# Altium PCB PT-MIS-PCB-006_v1 PCB.PcbDoc
Units mil, origin at the board's own origin, x right, y up, seen from the top; angles counter-clockwise.
Board outline 3267.72 x 3937.01 mil, 2 copper layers (Top Layer, Bottom Layer), stack 62.192 mil thick; 14 components, 15 nets, 77 pads, 61 vias.
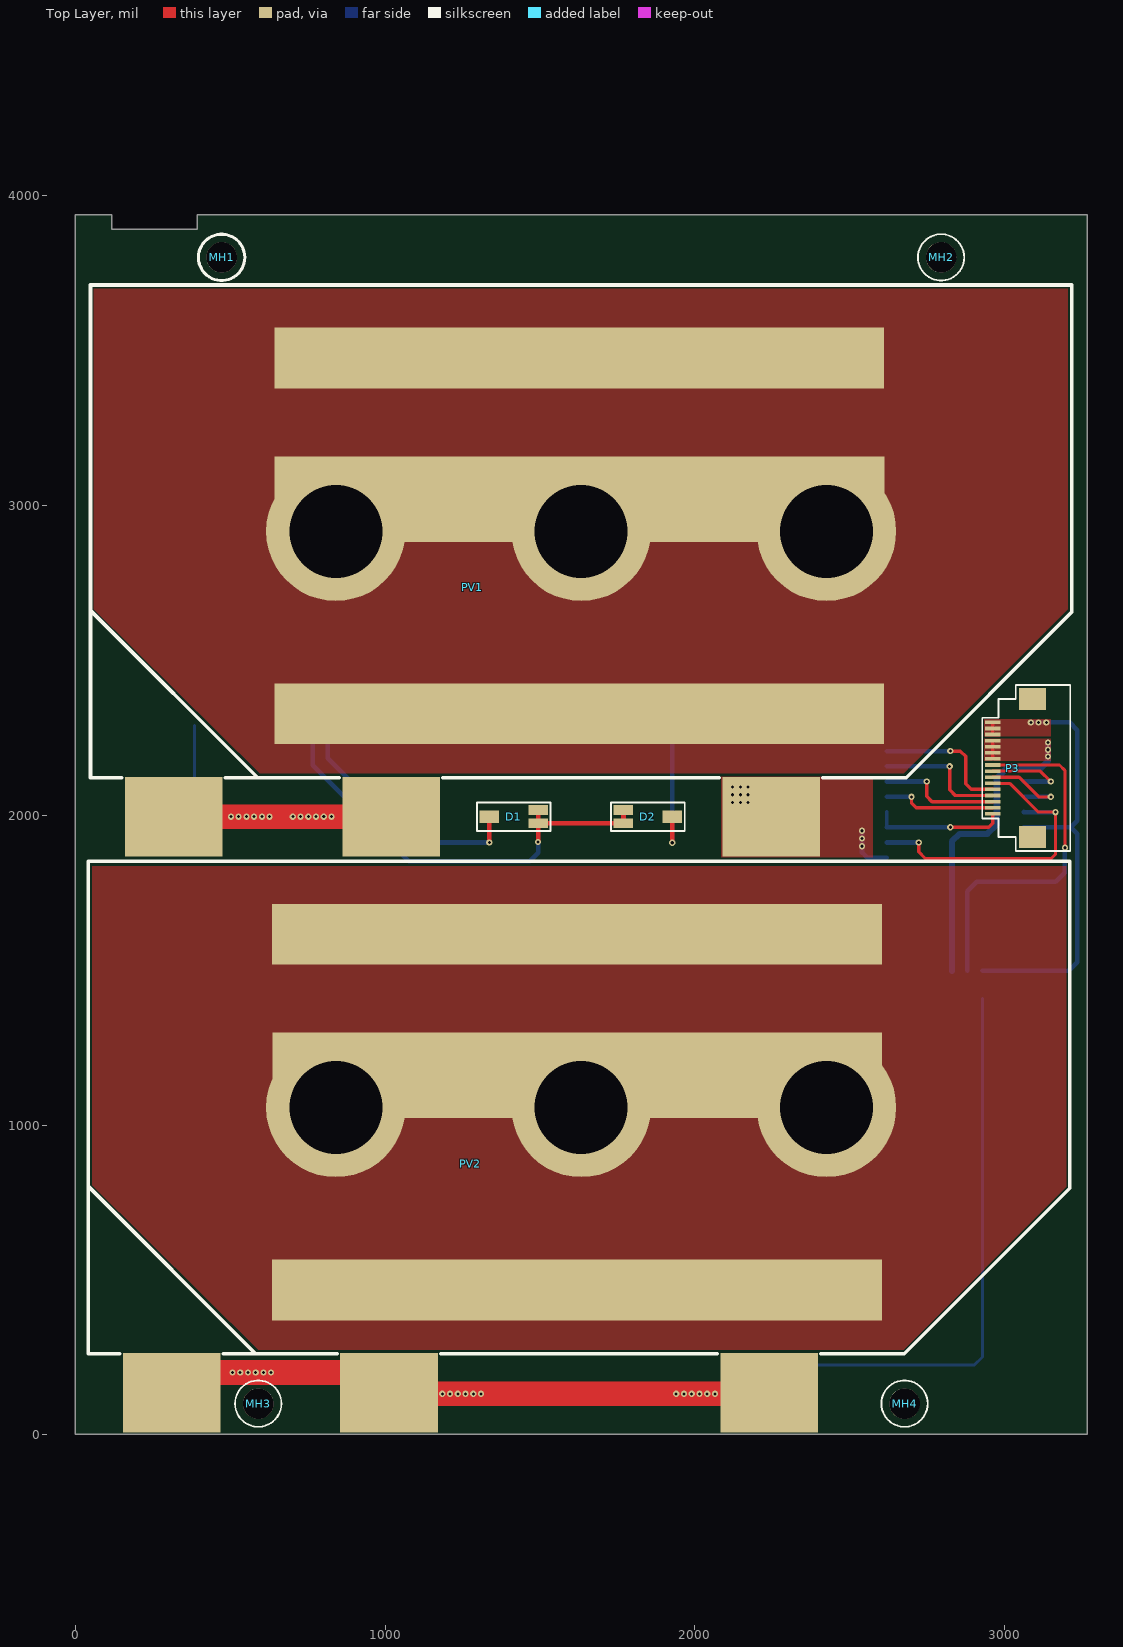
[diagram p0: Top Layer view]
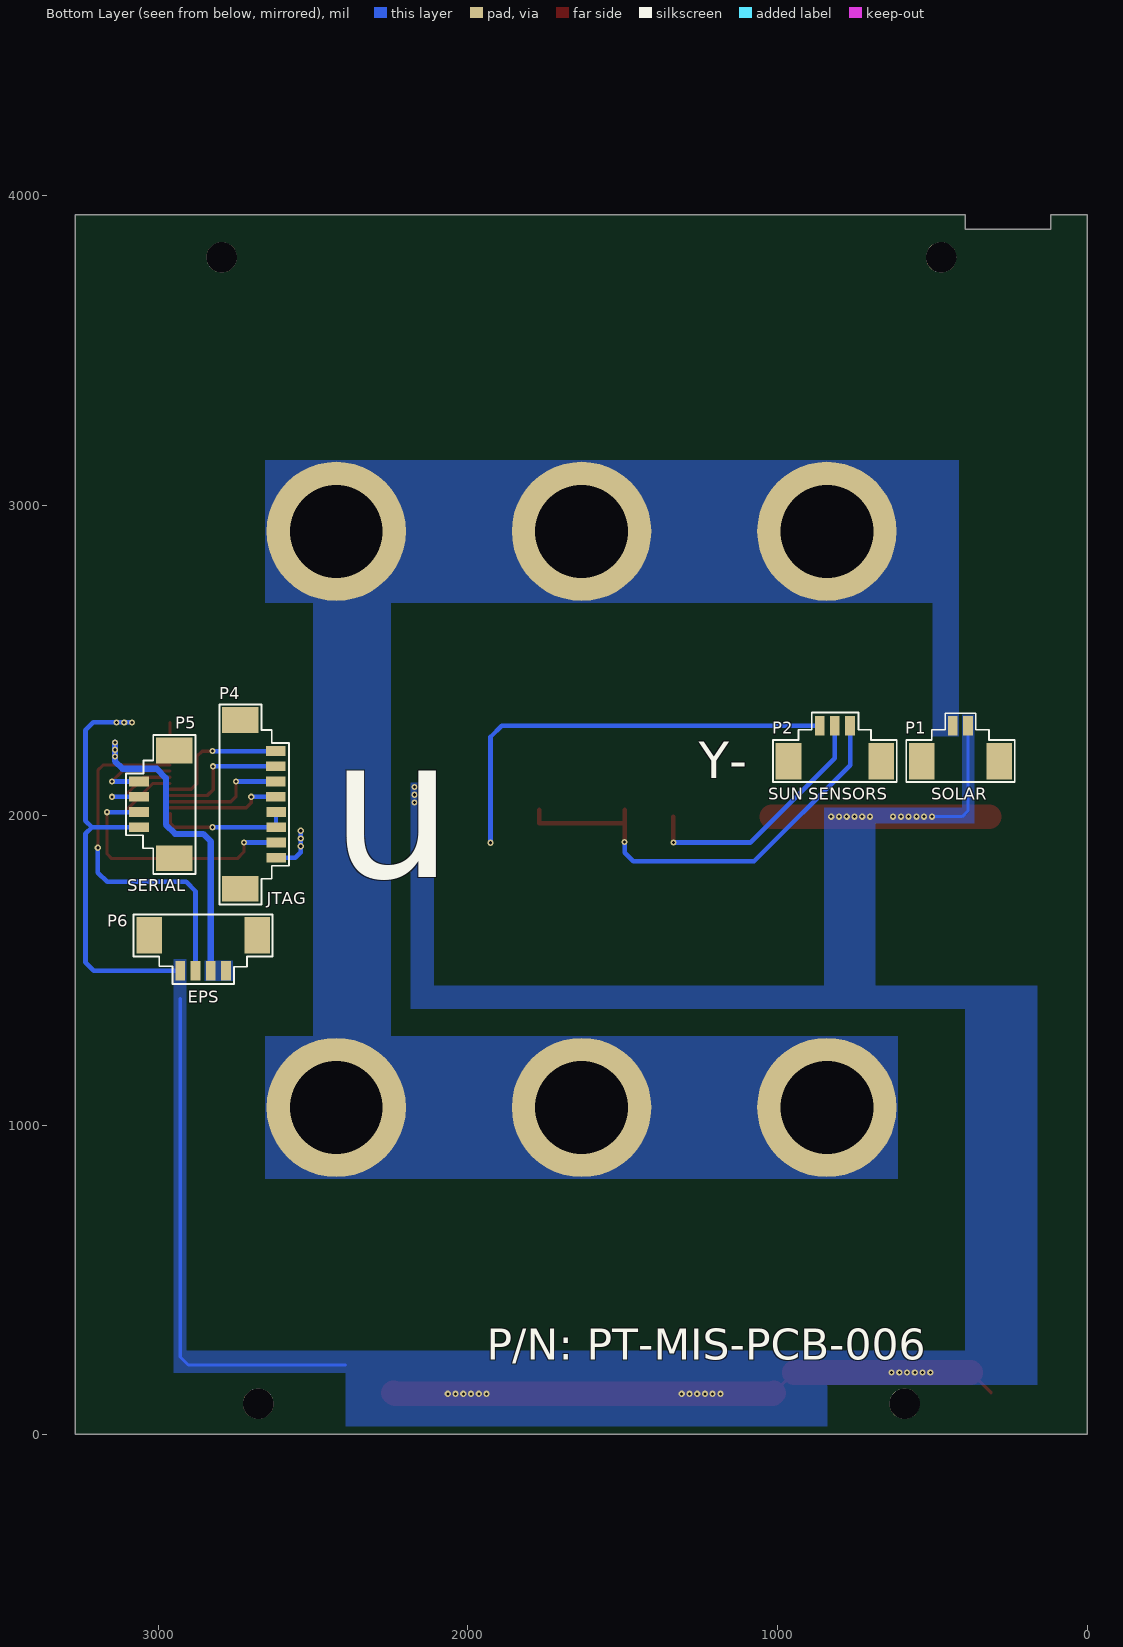
[diagram p1: Bottom Layer view, seen from below]
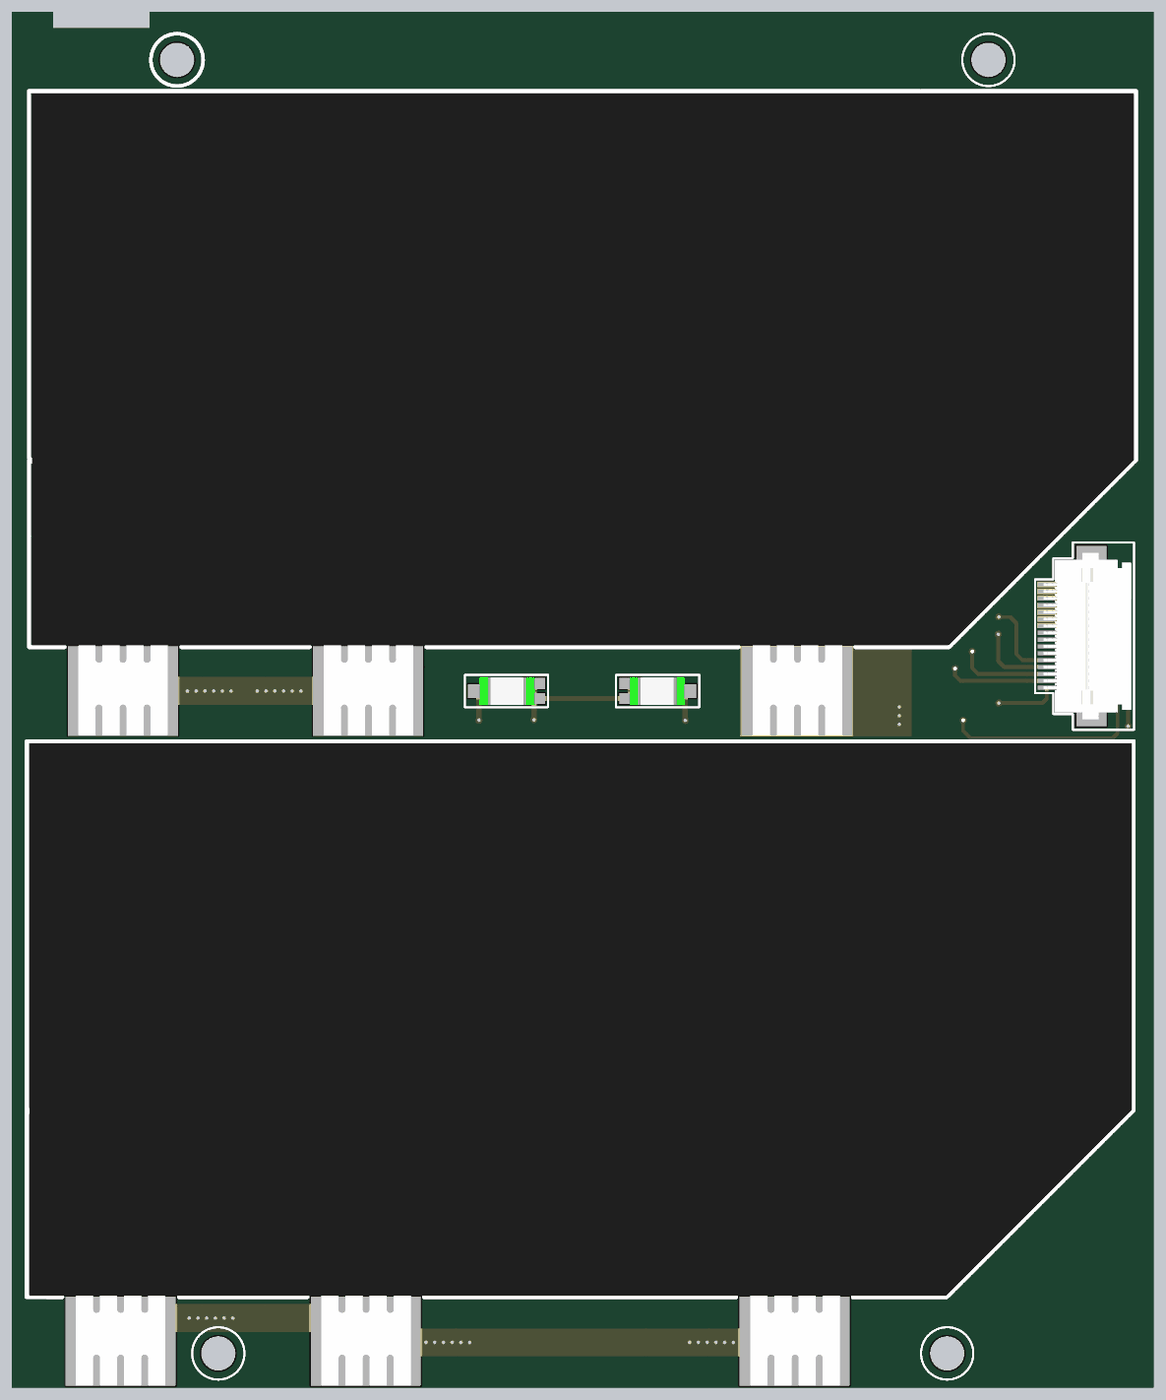
[diagram p2: 3D render of the assembled board from above, using the file's embedded part models]
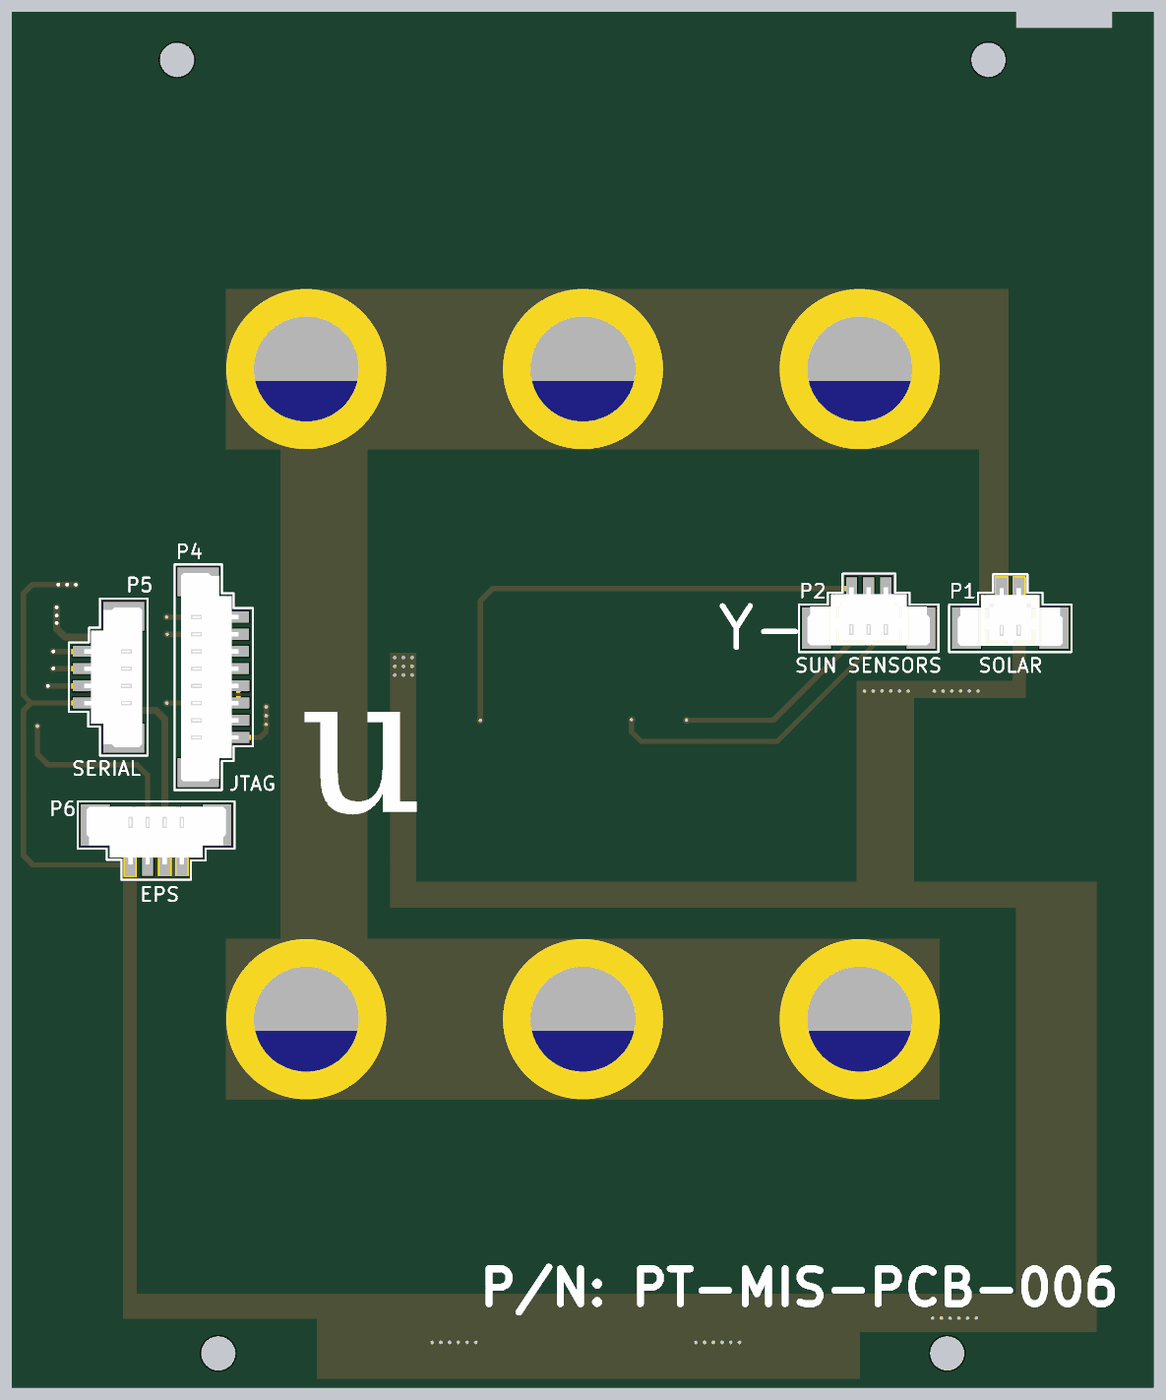
[diagram p3: 3D render of the assembled board from below, using the file's embedded part models]

## Layer stack, top to bottom
Top Solder: solder mask 0.4, Solder Resist, Dk 3.5
Top Layer: signal copper 1.4
Dielectric 1: dielectric 59.3921, FR-4, Dk 4.8
Bottom Layer: signal copper 1.4
Bottom Solder: solder mask 0.4, Solder Resist, Dk 3.5

## Board outline
0,2.01 0,3939.02 118.11,3939.02 118.11,3891.77 393.7,3891.77 393.7,3939.02 3267.72,3939.02 3267.72,2.01

## Design rules (kind name [scope] priority, off if disabled: settings)
Clearance [All] p1: gap=7.87 ignorepadtopadclearanceinfootprint=FALSE
HoleSize [All] p1: absolutevalues=TRUE maxlimit=300 minlimit=1 maxpercent=80.000 minpercent=20.000
MinimumSolderMaskSliver [All] p1 off: minsoldermaskwidth=10
PolygonConnect [All] p1: connectstyle=Direct reliefconductorwidth=10 reliefentries=4 polygonreliefangle="90 Angle" airgapwidth=10
RoutingVias [All] p1: holewidth=28 width=50 viastyle="Through Hole" minholewidth=28 minwidth=50 maxholewidth=28 maxwidth=50
SilkToSilkClearance [All] p1 off: silktosilkclearance=10
SilkToSolderMaskClearance [IsPad] p1 off: minsilkscreentomaskgap=10 clearancetoexposedcopper=TRUE
SolderMaskExpansion [All] p1: expansion=4
Width [All] p1: maxlimit=100 minlimit=10 preferedwidth=10
26 further rules are at their usual default settings.

## Classes and differential pairs
component class "[03] - SCHEMATIC": D1 D2 MH1 MH2 MH3 MH4 P2 P3 P5 P6 PV1 PV2 q

## Components (designator, comment, footprint, x,y, rotation, side; value= is the part's Value field where it differs from the comment)
D1 "TEMD6010FX01" TEMD6010FX01 1414.49,1995.51 r180 top
D2 "TEMD6010FX01" TEMD6010FX01 1849.49,1995.51 r0 top
MH1 "MH_3.8MMNC_2.5MMD" MH_3.8MMNC_2MMD_NON_COPPER_NPTH 472.44,3801.22 r0 top
MH2 "MH_3.8MMNC_2.5MMD" MH_3.8MMNC_2MMD_NON_COPPER_NPTH 2795.27,3801.22 r0 top
MH3 "MH_3.8MMNC_2.5MMD" MH_3.8MMNC_2MMD_NON_COPPER_NPTH 590.55,100.43 r0 top
MH4 "MH_3.8MMNC_2.5MMD" MH_3.8MMNC_2MMD_NON_COPPER_NPTH 2677.16,100.43 r0 top
P1 "0533980271" 0533980271 410,2232.09 r180 bottom
P2 "0533980371" 0533980371 815.39,2232.09 r180 bottom
P3 "FH12-16S-0.5SH(55)" FH12-16S-0.5SH(55) 3026.02,2152.44 r90 top
P4 "0533980871" 0533980871 2677.16,2035 r270 bottom
P5 "0533980471" 0533980471 3005,2035 r90 bottom
P6 "0533980471" 0533980471 2855,1555 r0 bottom
PV1 "AZUR SPACE 3G30A" "AZUR SPACE 3G30A" 1627.7,3020.83 r180 top
PV2 "AZUR SPACE 3G30A" "AZUR SPACE 3G30A" 1620.92,1160.83 r180 top

## Footprints (in the part's own frame and the unit in brackets; to place one, negate y for a bottom-side part, rotate by r counter-clockwise, add the part's x,y. Pads: shape width x height; smd on the part's side, far side on the other; paste and mask are expansions set on the pad)
0533980271 [mm] "CONN HEADER 2POS 1.25MM VERT SMD"
  rect 2.1x3 smd: 0(-3.175,-1.45) 0(3.175,-1.45)
  rect 0.8x1.6 smd: 1(-0.625,1.45) 2(0.625,1.45)
  silkscreen extent -4.45,-3.17 4.45,2.48, body extent -3.82,-2.72 3.83,1.48, height 4.71
0533980371 [mm] "CONN HEADER 3POS 1.25MM VERT SMD"
  rect 2.1x3 smd: 0(-3.8,-1.45) 0(3.8,-1.45)
  rect 0.8x1.6 smd: 1(-1.25,1.45) 2(0,1.45) 3(1.25,1.45)
  silkscreen extent -5.07,-3.18 5.07,2.53, body extent -4.45,-2.67 4.45,1.53, height 4.68
0533980471 [mm] "CONN HEADER 4POS 1.25MM VERT SMD"
  rect 2.1x3 smd: 0(-4.425,-1.45) 0(4.425,-1.45)
  rect 0.8x1.6 smd: 1(-1.875,1.45) 2(-0.625,1.45) 3(0.625,1.45) 4(1.875,1.45)
  silkscreen extent -5.7,-3.18 5.7,2.53, body extent -5.08,-2.77 5.07,1.43, height 4.74
0533980871 [mm] "CONN HEADER 8POS 1.25MM VERT SMD"
  rect 2.1x3 smd: 0(-6.925,-1.462) 0(6.925,-1.462)
  rect 0.8x1.6 smd: 1(-4.375,1.438) 2(-3.125,1.438) 3(-1.875,1.438) 4(-0.625,1.437) 5(0.625,1.463) 6(1.875,1.463) 7(3.125,1.463) 8(4.375,1.463)
  silkscreen extent -8.2,-3.19 8.2,2.51, body extent -7.58,-2.72 9.55,1.65, height 4.68
"AZUR SPACE 3G30A" [mm] "30% Triple Junction GaAs Solar Cell Assembly"
  rect 50x7 smd: 1(0,0)
  rect 50x5 smd: 1(0.026,17.602) 1(0.026,-11.557)
  rect 8x6.5 smd: 2(-15.727,26.043) 2(15.448,26.043) 3(33.273,26.043)
  silkscreen extent -40.38,-17.55 40.1,22.85, body extent -40.25,-17.41 39.9,29.27, height 0.31
FH12-16S-0.5SH(55) [mm] "CONN FFC BOTTOM 16POS 0.50MM R/A"
  rect 0.3x1.3 smd mask+0.05: 1(-3.75,1.625) 2(-3.25,1.625) 3(-2.75,1.625) 4(-2.25,1.625) 5(-1.75,1.625) 6(-1.25,1.625) 7(-0.75,1.625) 8(-0.25,1.625) 9(0.25,1.625) 10(0.75,1.625) 11(1.25,1.625) 12(1.75,1.625) 13(2.25,1.625) 14(2.75,1.625) 15(3.25,1.625) 16(3.75,1.625)
  rect 1.8x2.2 smd: MP1(5.65,-1.625) MP2(-5.65,-1.625)
  silkscreen extent -6.8,-4.72 6.8,2.48, body extent -7.4,-4.55 6.05,1.85, height 2.04
MH_3.8MMNC_2MMD_NON_COPPER_NPTH [mm] "Mounting Hole 3.8mm Diameter (Non Copper), 2mm Drill NPTH"
  round 2.5 hole 2.5 unplated: 1(0,0)
  silkscreen extent -1.9,-1.9 1.9,1.9
TEMD6010FX01 [mm]
  rect 1.6x0.8 smd: 1(-2.025,-0.55) 1(-2.025,0.55)
  rect 1.6x1 smd: 2(1.975,0)
  silkscreen extent -3.05,-1.17 3,1.18, body extent -2.07,-1 1.93,1, height 1.01

## Part data
D1 D2: "Ambient Light Sensor", Current - Dark (Typ)=2nA, Manufacturer="Vishay Semiconductors", Operating Temperature="-40°C ~ 100°C", Standard Package=3,000, Supplier Part Number 1=751-1051-1-ND, Voltage - DC Reverse (Vr) (Max)=16V, Active Area=0.27mm², Catalog Drawings=TEMx60x0(F)X01, Category="Sensors, Transducers", ComponentLink1Description=https://datasheet.ciiva.com/8280/temd6010-8280593.pdf, ComponentLink1URL=https://datasheet.ciiva.com/8280/temd6010-8280593.pdf, ComponentLink2Description=https://datasheet.ciiva.com/1252/temd6010-1252130.pdf, ComponentLink2URL=https://datasheet.ciiva.com/1252/temd6010-1252130.pdf, ComponentLink3Description=https://datasheet.ciiva.com/2819/temd6010-2819730.pdf, ComponentLink3URL=https://datasheet.ciiva.com/2819/temd6010-2819730.pdf, ComponentLink4Description=https://datasheet.ciiva.com/2819/temd6010-2819731.pdf, ComponentLink4URL=https://datasheet.ciiva.com/2819/temd6010-2819731.pdf, ComponentLink5Description=https://datasheet.ciiva.com/2819/temd6010-2819732.pdf, ComponentLink5URL=https://datasheet.ciiva.com/2819/temd6010-2819732.pdf, ComponentLink6Description=https://datasheet.ciiva.com/4270/temd6010-4270070.pdf, ComponentLink6URL=https://datasheet.ciiva.com/4270/temd6010-4270070.pdf, ComponentLink7Description=https://datasheet.ciiva.com/46430/1794172-46430214.pdf, ComponentLink7URL=https://datasheet.ciiva.com/46430/1794172-46430214.pdf, ComponentLink8Description=https://datasheet.ciiva.com/1249/temd6010-1249179.pdf, ComponentLink8URL=https://datasheet.ciiva.com/1249/temd6010-1249179.pdf, ComponentLink9Description=https://datasheet.ciiva.com/4697/temd6010-102586-4697659.pdf, ComponentLink9URL=https://datasheet.ciiva.com/4697/temd6010-102586-4697659.pdf, Diode Type=PIN, Family="Optical Sensors - Photodiodes", Featured Product="Surface-Mount Ambient Light Sensing Photodiodes", Manufacturer Part Number=TEMD6010FX01, Mounting Type="Surface Mount", Online Catalog="Ambient Light Sensor", Other Names=751-1051-2, Packaging="Tape & Reel (TR)", Pricing 1="1=2.26, 10=1.998, 25=1.4824, 100=1.2892, 250=1.1603, 500=1.0314, 1000=0.8863 (USD)", Product Training Modules="Ambient Light Sensors", Spectral Range="430nm ~ 610nm", Stock 1=29, Supplier 1=Digi-Key, Viewing Angle=120°, Wavelength=540nm
MH1 MH2 MH3 MH4: library part MH_3.8MMNC_2MMD, "Mounting Hole 3.8mm Diameter (Non Copper), 2.5mm Drill NPTH"
P1: "2 Positions Header, Shrouded Connector 0.049\" (1.25mm) Surface Mount, Vertical Tin", Color=Natural, Manufacturer=Molex, Supplier Part Number 1=WM7606CT-ND, Category="Connectors, Interconnects", ComponentLink1Description=https://datasheet.ciiva.com/6813/533980271-sd-6813860.pdf, ComponentLink1URL=https://datasheet.ciiva.com/6813/533980271-sd-6813860.pdf, ComponentLink2Description=https://datasheet.ciiva.com/3117/0533980271-pcb-headers-3117624.pdf, ComponentLink2URL=https://datasheet.ciiva.com/3117/0533980271-pcb-headers-3117624.pdf, ComponentLink3Description=https://datasheet.ciiva.com/3117/0533980271-pcb-headers-3117625.pdf, ComponentLink3URL=https://datasheet.ciiva.com/3117/0533980271-pcb-headers-3117625.pdf, ComponentLink4Description=https://datasheet.ciiva.com/6813/533980271-sd-6813869.pdf, ComponentLink4URL=https://datasheet.ciiva.com/6813/533980271-sd-6813869.pdf, Connector Type="Header, Shrouded", Contact Finish=Tin, Contact Finish Thickness="39µin (1.00µm)", Contact Mating Length=-, Contact Type="Blade Pin", Family="Rectangular Connectors - Headers, Male Pins", Fastening Type=-, Features="Solder Retention", Manufacturer Part Number=0533980271, Mounting Type="Surface Mount", Number of Positions=2, Number of Positions Loaded=All, Number of Rows=1, Packaging="Cut Tape (CT)", Pitch="0.049\" (1.25mm)", Pricing 1="1=0.88, 10=0.778, 100=0.6713, 500=0.5493 (USD)", Row Spacing=-, Series="PicoBlade™ 53398", Stock 1=25214, Supplier 1=Digi-Key, Termination=Solder
P2: "3 Positions Header, Shrouded Connector 0.049\" (1.25mm) Surface Mount, Vertical Tin", Color=Natural, Manufacturer=Molex, Supplier Part Number 1=WM7607CT-ND, Category="Connectors, Interconnects", ComponentLink1Description=https://datasheet.ciiva.com/6813/533980271-sd-6813860.pdf, ComponentLink1URL=https://datasheet.ciiva.com/6813/533980271-sd-6813860.pdf, ComponentLink2Description=https://datasheet.ciiva.com/3117/0533980371-pcb-headers-3117626.pdf, ComponentLink2URL=https://datasheet.ciiva.com/3117/0533980371-pcb-headers-3117626.pdf, ComponentLink3Description=https://datasheet.ciiva.com/3117/0533980371-pcb-headers-3117627.pdf, ComponentLink3URL=https://datasheet.ciiva.com/3117/0533980371-pcb-headers-3117627.pdf, Connector Type="Header, Shrouded", Contact Finish=Tin, Contact Finish Thickness="39µin (1.00µm)", Contact Mating Length=-, Contact Type="Blade Pin", Family="Rectangular Connectors - Headers, Male Pins", Fastening Type=-, Features="Solder Retention", Manufacturer Part Number=0533980371, Mounting Type="Surface Mount", Number of Positions=3, Number of Positions Loaded=All, Number of Rows=1, Packaging=Digi-Reel®, Pitch="0.049\" (1.25mm)", Pricing 1="1=1.07, 10=0.942, 100=0.8126, 500=0.6649 (USD)", Row Spacing=-, Series="PicoBlade™ 53398", Stock 1=26974, Supplier 1=Digi-Key, Termination=Solder
P3: "16 Position FFC, FPC Connector Contacts, Bottom 0.020\" (0.50mm) Surface Mount, Right Angle", Colour=Beige,Brown, Contact Resistance=50mR, Current Rating=500mA, Flammability Rating="UL94 V-0", Housing Colour=Beige, Insulation Resistance=500MR, Manufacturer=Hirose, Manufacturer Part Number=FH12-12S-0.5SH(55), Max Current Rating=400mA, Max Operating Temperature=70°C, Max Voltage Rating (AC)=50V, Min Operating Temperature=-40°C, Package Quantity=2000, Supplier Part Number 1=HFJ112DKR-ND, Actuator Material=Polyphenylene, ComponentLink1Description=https://datasheet.ciiva.com/7661/58803-7661368.pdf, ComponentLink1URL=https://datasheet.ciiva.com/7661/58803-7661368.pdf, ComponentLink2Description=https://datasheet.ciiva.com/15176/getdatasheetpartid-445111-15176856.pdf, ComponentLink2URL=https://datasheet.ciiva.com/15176/getdatasheetpartid-445111-15176856.pdf, ComponentLink3Description=https://datasheet.ciiva.com/5137/ed-fh12-20140305-355586-5137625.pdf, ComponentLink3URL=https://datasheet.ciiva.com/5137/ed-fh12-20140305-355586-5137625.pdf, ComponentLink4Description=https://datasheet.ciiva.com/22630/58803-22630334.pdf, ComponentLink4URL=https://datasheet.ciiva.com/22630/58803-22630334.pdf, Contact Location=Bottom, Contact Material=Bronze, Contact Plating=Gold, Depth=5.6mm, Gender=Female, Housing Material=Polyamide, Lead Free="Lead Free", Lead Pitch=0.5mm, Length=10.1mm, Material=Polyamide, Mating Cycles=20, Mount="Surface Mount", Number of Contacts=12, Number of Positions=12, Number of Rows=1, Orientation="Right Angle", Packaging="Tape and Reel", Pitch=0.5mm, Pricing 1="1=1.63, 10=1.482, 25=1.3916, 50=1.331, 100=1.2705, 250=1.14952, 500=1.05876, 1000=0.9075 (USD)", Radiation Hardening=No, REACH SVHC="No SVHC", Stock 1=9280, Supplier 1=Digi-Key, Termination=Solder, Voltage Rating=50V, Voltage Rating (AC)=50V, Width=10.1mm, Wire/Cable Type=Straight
P4: "8 Positions Header, Shrouded Connector 0.049\" (1.25mm) Surface Mount, Vertical Tin", Colour=Natural, Contact Resistance=20mR, Current Rating=1A, Flammability Rating="UL94 V-0", Housing Colour=Black, Insulation Resistance=100MR, Manufacturer=Molex, Manufacturer Part Number=53398-0871, Max Current Rating=3A, Max Operating Temperature=85°C, Max Voltage Rating (AC)=250V, Min Operating Temperature=-40°C, Package Quantity=1000, Supplier Part Number 1=WM7612DKR-ND, Voltage Rating=125V, ComponentLink1Description=https://datasheet.ciiva.com/5149/0533980871-pcb-headers-146617-5149937.pdf, ComponentLink1URL=https://datasheet.ciiva.com/5149/0533980871-pcb-headers-146617-5149937.pdf, ComponentLink2Description=https://datasheet.ciiva.com/11748/0900766b80ab946a-11748897.pdf, ComponentLink2URL=https://datasheet.ciiva.com/11748/0900766b80ab946a-11748897.pdf, ComponentLink3Description=https://datasheet.ciiva.com/36525/1302220-36525970.pdf, ComponentLink3URL=https://datasheet.ciiva.com/36525/1302220-36525970.pdf, ComponentLink4Description=https://datasheet.ciiva.com/7683/1867383-7683797.pdf, ComponentLink4URL=https://datasheet.ciiva.com/7683/1867383-7683797.pdf, ComponentLink5Description=https://datasheet.ciiva.com/7683/1632066-7683911.pdf, ComponentLink5URL=https://datasheet.ciiva.com/7683/1632066-7683911.pdf, ComponentLink6Description=https://datasheet.ciiva.com/14156/gf116833-116846-e-14156249.pdf, ComponentLink6URL=https://datasheet.ciiva.com/14156/gf116833-116846-e-14156249.pdf, ComponentLink7Description=https://datasheet.ciiva.com/9468/0533980871-pcb-headers-9468298.pdf, ComponentLink7URL=https://datasheet.ciiva.com/9468/0533980871-pcb-headers-9468298.pdf, ComponentLink8Description=https://datasheet.ciiva.com/30196/226800533980871-pcb-headers-30196122.pdf, ComponentLink8URL=https://datasheet.ciiva.com/30196/226800533980871-pcb-headers-30196122.pdf, ComponentLink9Description=https://datasheet.ciiva.com/6083/1632066-6083006.pdf, ComponentLink9URL=https://datasheet.ciiva.com/6083/1632066-6083006.pdf, Contact Material=Bronze,Brass,Tin, Contact Plating=Tin, Depth=6.6mm, Gender=Male, Glow Wire Compliant=Non-compliant, Height=11.81mm, Housing Material=Nylon, Lead Free="Lead Free", Length=20.33mm, Mount="Surface Mount,Through Hole", Number of Circuits=8, Number of Contacts=8, Number of Positions=8, Number of Rows=1, Orientation=Vertical, Packaging="Tape and Reel", Pitch=1.25mm, Pricing 1="1=1.52, 10=1.377, 100=1.1804, 500=0.98368 (USD)", Radiation Hardening=No, REACH SVHC=Unknown, Stock 1=26930, Supplier 1=Digi-Key, Termination=SMD/SMT, Voltage Rating (DC)=125V
P5 P6: "4 Positions Header, Shrouded Connector 0.049\" (1.25mm) Surface Mount, Right Angle Tin", Colour=Natural, Contact Resistance=20mR, Current Rating=1A, Flammability Rating="UL94 V-0", Insulation Resistance=100MR, Manufacturer=Molex, Manufacturer Part Number=53398-0471, Max Operating Temperature=85°C, Min Operating Temperature=-40°C, Package Quantity=1000, Supplier Part Number 1=WM7608CT-ND, Voltage Rating=125V, Body Plating=Tin, ComponentLink1Description=https://datasheet.ciiva.com/5154/0533980471-pcb-headers-171069-5154864.pdf, ComponentLink1URL=https://datasheet.ciiva.com/5154/0533980471-pcb-headers-171069-5154864.pdf, ComponentLink2Description=https://datasheet.ciiva.com/39121/1932627-39121616.pdf, ComponentLink2URL=https://datasheet.ciiva.com/39121/1932627-39121616.pdf, ComponentLink3Description=https://datasheet.ciiva.com/23964/0533980471-pcb-headers-23964130.pdf, ComponentLink3URL=https://datasheet.ciiva.com/23964/0533980471-pcb-headers-23964130.pdf, ComponentLink4Description=https://datasheet.ciiva.com/14156/gf116833-116846-e-14156245.pdf, ComponentLink4URL=https://datasheet.ciiva.com/14156/gf116833-116846-e-14156245.pdf, ComponentLink5Description=https://datasheet.ciiva.com/28592/0533980471-pcb-headers-28592022.pdf, ComponentLink5URL=https://datasheet.ciiva.com/28592/0533980471-pcb-headers-28592022.pdf, ComponentLink6Description=https://datasheet.ciiva.com/22700/1841151-22700615.pdf, ComponentLink6URL=https://datasheet.ciiva.com/22700/1841151-22700615.pdf, ComponentLink7Description=https://datasheet.ciiva.com/30178/225160533980471-pcb-headers-30178167.pdf, ComponentLink7URL=https://datasheet.ciiva.com/30178/225160533980471-pcb-headers-30178167.pdf, ComponentLink8Description=https://datasheet.ciiva.com/11748/0900766b80ab946a-11748472.pdf, ComponentLink8URL=https://datasheet.ciiva.com/11748/0900766b80ab946a-11748472.pdf, ComponentLink9Description=https://datasheet.ciiva.com/31408/0533980471-pcb-headers-31408393.pdf, ComponentLink9URL=https://datasheet.ciiva.com/31408/0533980471-pcb-headers-31408393.pdf, ComponentLink10Description=https://datasheet.ciiva.com/46384/1788582-46384012.pdf, ComponentLink10URL=https://datasheet.ciiva.com/46384/1788582-46384012.pdf, ComponentLink11Description=https://datasheet.ciiva.com/9468/0533980471-pcb-headers-9468286.pdf, ComponentLink11URL=https://datasheet.ciiva.com/9468/0533980471-pcb-headers-9468286.pdf, ComponentLink12Description=https://datasheet.ciiva.com/16658/0533980471-pcb-headers-16658431.pdf, ComponentLink12URL=https://datasheet.ciiva.com/16658/0533980471-pcb-headers-16658431.pdf, Contact Material=Bronze,Brass,Tin, Contact Plating=Tin, Gender=Male, Glow Wire Compliant=Non-compliant, Housing Colour=Natural, Housing Material=Nylon, Lead Free="Lead Free", Lead Pitch=1.25mm, Mount="Surface Mount", Number of Circuits=4, Number of Contacts=4, Number of Positions=4, Number of Rows=1, Orientation=Vertical, Packaging="Tape and Reel", Pitch=1.25mm, Pricing 1="1=1.19, 10=1.044, 100=0.901, 500=0.73716 (USD)", Radiation Hardening=No, REACH SVHC=Unknown, Stock 1=49208, Supplier 1=Digi-Key, Termination=Solder, Voltage Rating (AC)=125V, Voltage Rating (DC)=125V, Working Voltage=125V
PV1 PV2: "30% Triple Junction GaAs Solar Cell Assembly", Current at max. Power="502.9 mA", Voltage at max.Power="2409 mV", Average Efficiency (1353 W/m^2)=29.6, Average Efficiency (1367 W/m^2)=29.3, Average Open Circuit (BOL)="2690 mV", Average Short Circuit (BOL)="519.6 mA"

## Free pads (board coordinates)
  round 450 hole 300: 2(841.12,2916.63) 2(841.14,1056.63) 2(1633.23,1056.63) 2(1633.23,2916.63) 2(2425.33,2916.63) 2(2425.35,1056.63)

## Via types
v1: diameter 20, hole 10, Top Layer to Bottom Layer, tented both sides, 61 vias

## Nets (pads, with @x,y where several pads share a name; then routed paths per layer and width w, separated by ;. In a path a pad name is that pad's centre, name@x,y a point inside that pad or via, vN(x,y) a via of type N, cw(c..) or ccw(c..) an arc to the next point about the centre after c; other vN are vias at no path point)
2.35V: P1.1 pad.2 PV1.1 PV2.1
3V3: P3.6 P4.7 P5.2 | length 1070.4
  Top Layer w10: v1(2723.03,1911.97) 2723.03,1881.97 2745,1860 3150,1860 3165,1875 v1(3165,2010) 3110,2010 3016.77,2103.23 P3.6
  Bottom Layer w15: P4.7 v1(2723.03,1911.97) ; P5.2 3062.48,2010 v1(3165,2010)
EPS_C: P3.10 P3.11 P3.12 P3.13 P6.1 P6.2 | length 1041.5
  Top Layer w10: P3.10 P3.11 P3.12 P3.13
  Bottom Layer w20: P6.2 2830.39,1915.39 2855,1940 2945,1940 2975,1970 2975,2120 3005,2150 3115,2150 3140,2175 v1(3140,2190) v1(3140,2211.5) v1(3140,2235)
EPS_CS: P3.9 P6.3 | length 1167.2
  Top Layer w10: P3.9 3177.72,2162.28 3195,2145 v1(3195,1895)
  Bottom Layer w15: P6.3 2879.61,1754.61 2910,1785 3165,1785 3195,1815 v1(3195,1895)
GND: P1.2 P3.14 P3.15 P3.16 P4.8 P5.1 P6.4 PV1.2 PV1.3 PV2.2 PV2.3 | length 6381
  Top Layer w10: PV2.3 PV2.3@376.79,201.36 ; PV2.2@946.87,201.36 PV2.2@1012.72,135.51 ; P3.14@2962.05,2261.93 P3.15 P3.16
  Top Layer w80: PV1.3 v1(502.24,1995.51) v1(527.24,1995.51) v1(552.24,1995.51) v1(577.24,1995.51) v1(602.24,1995.51) v1(627.24,1995.51) v1(702.24,1995.51) v1(727.24,1995.51) v1(752.24,1995.51) v1(777.24,1995.51) v1(802.24,1995.51) v1(827.24,1995.51) PV1.2@1019.49,1995.51 ; PV2.3@376.79,201.36 v1(507.24,201.36) v1(532.24,201.36) v1(557.24,201.36) v1(582.24,201.36) v1(607.24,201.36) v1(632.24,201.36) PV2.2@946.87,201.36 ; PV2.2@1012.72,135.51 1016.22,132.01 v1(1185,132.01) v1(1210,132.01) v1(1235,132.01) v1(1260,132.01) v1(1285,132.01) v1(1310,132.01) v1(1940,132.01) v1(1965,132.01) v1(1990,132.01) v1(2015,132.01) v1(2040,132.01) v1(2065,132.01) 2236.57,132.01 PV2.2@2240.08,135.51
  Bottom Layer w10: P1.2 385.39,2014.61 404.49,1995.51 v1(502.24,1995.51) ; 2395,225 2902.64,225 2928.82,251.18 2928.82,1407.91
  Bottom Layer w15: v1(2540,1950) v1(2540,1925) v1(2540,1900) 2540,1880 2557.24,1862.76 P4.8 ; P6.4 3207.91,1497.91 3235,1525 3235,1940 3213.82,1961.18 ; P5.1 3213.82,1961.18 ; v1(3085,2300) v1(3110,2300) v1(3135,2300) 3210,2300 3235,2275 3235,1982.36 3213.82,1961.18
  other v1: 2122.24,2041.36 2147.24,2041.36 2172.24,2041.36 2122.24,2066.36 2147.24,2066.36 2172.24,2066.36 2122.24,2091.36 2147.24,2091.36 2172.24,2091.36
NetD1_1: D1.1 D2.1 P2.3 | length 1452.1
  Top Layer w15: v1(1494.21,1913.33) D1.1@1494.21,1973.86 ; D1.1@1494.21,2017.17 D1.1@1494.21,1973.86 ; D2.1@1769.76,2017.17 1769.76,1973.86 D1.1@1494.21,1973.86
  Bottom Layer w15: P2.3 766.18,2161.97 1076.58,1851.58 1466.58,1851.58 1494.21,1879.21 v1(1494.21,1913.33)
NetD1_2: D1.2 P2.2 | length 822.5
  Top Layer w15: v1(1336.73,1911.87) D1.2
  Bottom Layer w15: P2.2 815.39,2184.61 1088.13,1911.87 v1(1336.73,1911.87)
NetD2_2: D2.2 P2.1 | length 1503.3
  Top Layer w15: v1(1927.24,1911.36) D2.2
  Bottom Layer w15: P2.1 1890.83,2289.17 1927.24,2252.76 v1(1927.24,1911.36)
RESET_N: P3.1 P4.5 P4.6 | length 428.1
  Top Layer w10: P3.1@2961.85,2005 P3.1
  Top Layer w11: v1(2825,1961.18) 2949.17,1961.18 2961.85,1973.86 P3.1@2961.85,2005
  Bottom Layer w12: P4.6 P4.5
  Bottom Layer w15: P4.6 v1(2825,1961.18)
RX: P3.7 P5.3 | length 301.3
  Top Layer w10: P3.7 3047.09,2122.91 3110.39,2059.61 v1(3149.61,2059.61)
  Bottom Layer w15: P5.3 v1(3149.61,2059.61)
TCK: P3.4 P4.2 | length 425
  Top Layer w11: v1(2823.03,2158.03) 2823.03,2081.97 2841.14,2063.86 P3.4
  Bottom Layer w15: P4.2 v1(2823.03,2158.03)
TDI: P3.2 P4.4 | length 367.3
  Top Layer w11: v1(2699.61,2059.61) 2699.61,2040.39 2715.51,2024.49 P3.2
  Bottom Layer w15: P4.4 v1(2699.61,2059.61)
TDO: P3.5 P4.1 | length 444.6
  Top Layer w11: v1(2825,2207.24) 2857.76,2207.24 2875,2190 2875,2101.36 2892.82,2083.54 P3.5
  Bottom Layer w15: P4.1 v1(2825,2207.24)
TMS: P3.3 P4.3 | length 396.2
  Top Layer w11: v1(2748.82,2108.82) 2748.82,2061.18 2765.83,2044.17 P3.3
  Bottom Layer w15: P4.3 v1(2748.82,2108.82)
TX: P3.8 P5.4 | length 289.1
  Top Layer w10: P3.8 3115.83,2142.6 v1(3149.61,2108.82)
  Bottom Layer w15: P5.4 v1(3149.61,2108.82)
pads on no net: MH1.1 MH2.1 MH3.1 MH4.1 P1.0 P2.0 P3.MP1 P3.MP2 P4.0 P5.0 P6.0

## Polygon pours and split planes (outlines as drawn)
GND on Bottom Layer "GND_L02_P086" (solid, pour order 86): 850,1980 850,1445 685,1445 685,1980
2.35V on Bottom Layer "Bottom Layer-2.35V" (solid, pour order 82): 415,2255 415,3146.36 500,3146.36 500,2255
GND on Bottom Layer "Bottom Layer-GND" (solid, pour order 80): 2165,1375 2165,1450 393.7,1450 393.7,1375
no net on Bottom Layer "Bottom Layer-No Net" (solid, pour order 78): 2105,1375
GND on Bottom Layer "Bottom Layer-GND 1" (solid, pour order 76): 2185,2105 2110,2105 2110,1375 2185,1375
GND on Bottom Layer "Bottom Layer-GND 2" (solid, pour order 74): 2950,1535 2910,1535 2910,265 2950,265
no net on Bottom Layer "Bottom Layer-No Net 2" (solid, pour order 72): 2975,271.36
GND on Bottom Layer "Bottom Layer-GND 3" (solid, pour order 70): 2385,271.36 2385,200 2950,200 2950,271.36
2.35V on Bottom Layer "Bottom Layer-2.35V 1" (solid, pour order 68): 2500,1285 2500,2703.03 2250,2703.03 2250,1285
GND on Bottom Layer "Bottom Layer-GND 4" (solid, pour order 66): 404.1,2325 365,2325 365,1975 404.1,1975
no net on Bottom Layer "Bottom Layer-No Net 3" (solid, pour order 62): 2200,2125
GND on Bottom Layer "Bottom Layer-GND 5" (solid, pour order 60): 850,2025 850,1975 375,1975 375,2025
EPS_C on Bottom Layer "Bottom Layer-EPS_C" (solid, pour order 58): 2850,1530 2760,1530 2760,1465 2850,1465
GND on Bottom Layer "Bottom Layer-No Net 1" (solid, pour order 48): 840,162.01 840,27.01 2395,27.01 2395,161.36
GND on Bottom Layer "Bottom Layer-No Net 1" (solid, pour order 36): 162.24,1450 393.7,1450 393.7,231.36 162.24,231.36
GND on Bottom Layer "Bottom Layer-No Net 1" (solid, remove dead copper, pour order 34): 2395,271.36 2395,161.36 162.24,161.36 162.24,271.36
2.35V on Bottom Layer "Bottom Layer-No Net 1" (solid, remove dead copper, pour order 24): 455,3146.36 455,2686.36 2655,2686.36 2655,3146.36
2.35V on Bottom Layer "Bottom Layer-No Net 1" (solid, remove dead copper, pour order 18): 612.24,1286.36 612.24,826.36 2655,826.36 2655,1286.36
GND on Top Layer "Top Layer-GND" (solid, pour order 84): 2085,2125 2575,2125 2575,1865 2085,1865
EPS_C on Top Layer "EPS_C_L01_P056" (solid, pour order 56): 2935,2248 2935,2175 3150,2175 3150,2248
GND on Top Layer "GND_L01_P054" (solid, pour order 54): 2935,2310 3150,2310 3150,2255 2935,2255
2.35V on Top Layer "Bottom Layer-No Net 1" (solid, remove dead copper, pour order 50): 60,3700 60,2665 595,2135 2675,2135 3205,2665 3205,3700
2.35V on Top Layer "Bottom Layer-No Net 1" (solid, remove dead copper, pour order 52): 55,1835 55,804.95 590,275 2675,275 3200,800 3200,1835

## Silkscreen, mask and mechanical layers (free items; w line width, h text height)
Top Overlay:
  circle w10: c472.44,3801.22 r74.8
Bottom Overlay:
  text "Y-" at 1255,2120 h118.11
  text "SOLAR" at 505,2050 h39.37
  text "SUN SENSORS" at 1030,2050 h39.37
  text "SERIAL" at 3100,1755 h39.37
  text "JTAG" at 2650,1712.17 h39.37
  text "u" at 2445,1650 h787.4
  text "EPS" at 2905,1395 h39.37
  text "P/N: PT-MIS-PCB-006" at 1939.17,241.51 h100
Mechanical Drawing:
  circle w10: c2677.16,100.43 r47.86
  circle w10: c590.55,100.43 r49.47
  circle w10: c472.44,3801.22 r48.77
  circle w10: c2795.27,3801.22 r50.06
  lines w5.91: 0,0 3267.72,0 3267.72,3937.01 393.7,3937.01 393.7,3889.76 118.11,3889.76 118.11,3937.01 0,3937.01 0,0
  text "Mechanical Drawing of PT-MIS-PCB-006_v1" at 515,4180 h60
  text "Units: mm" at -645,-350 h60
  text "Scale: 1:1" at -645,-450 h60
Board Outline:
  the board outline again, w5.91
ASM Top:
  text "Assembly TOP of PT-MIS-PCB-006_v1" at 700,3972.01 h60
ASM Bottom:
  text "Assembly BOTTOM of PT-MIS-PCB-006_v1" at 610,4077.01 h60

## Dimensions
590.55,95 to 0,0 on Mechanical Drawing
118.11,3937.01 to 393.7,3937.01 on Mechanical Drawing
118.11,3937.01 to 118.11,3889.76 on Mechanical Drawing
2677.16,85 to 590.55,80 on Mechanical Drawing
590.55,50.96 to 0,0 on Mechanical Drawing
0,0 to 3267.72,0 on Mechanical Drawing
0,0 to 0,3937.01 on Mechanical Drawing